# Altium PCB TarjetaMicrofono.PcbDoc
Units mil, origin at the board's own origin, x right, y up, seen from the top; angles counter-clockwise.
Board outline 1303.15 x 1129.92 mil, 2 copper layers (Top Layer, Bottom Layer); 10 components, 26 nets, 21 pads, 0 vias.
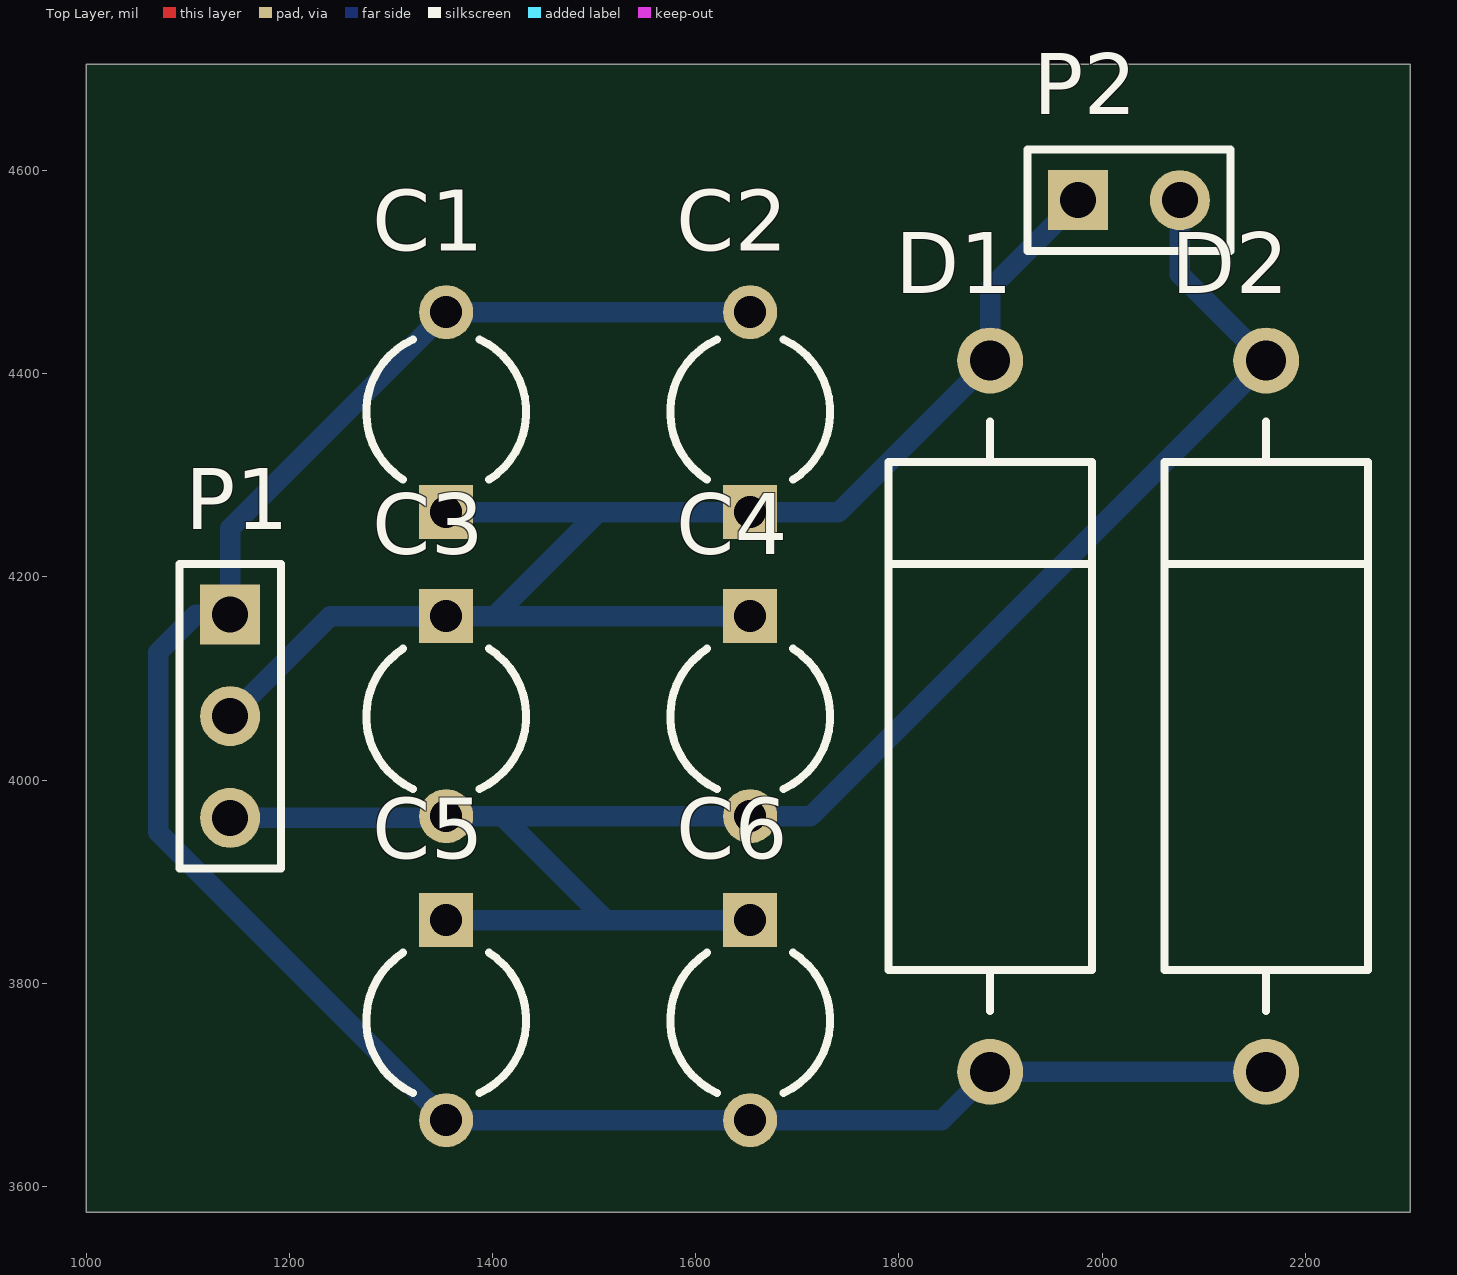
[diagram p0: Top Layer view]
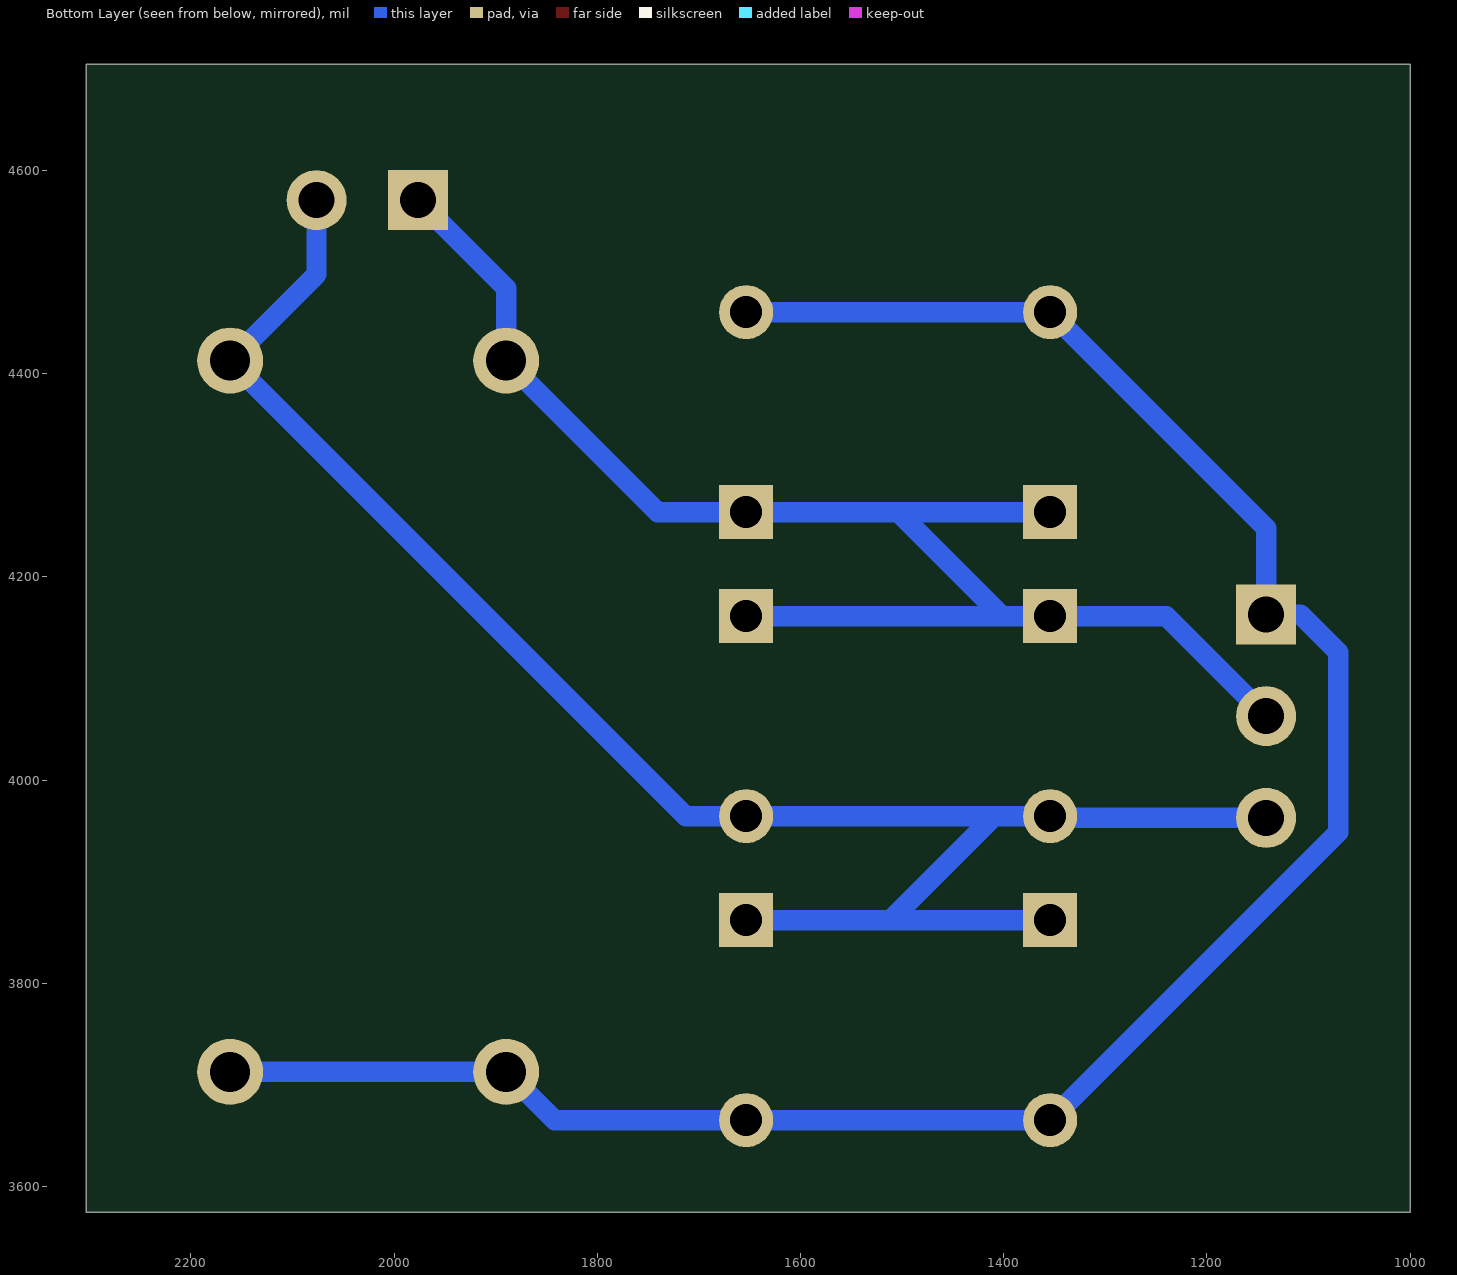
[diagram p1: Bottom Layer view, seen from below]

## Layer stack, top to bottom
Top Solder: solder mask 0.4, Solder Resist, Dk 3.5
Top Layer: signal copper 1.4
Dielectric 1: dielectric 12.6, FR-4, Dk 4.8
Bottom Layer: signal copper 1.4
Bottom Solder: solder mask 0.4, Solder Resist, Dk 3.5

## Board outline
1000,3574.8 2303.15,3574.8 2303.15,4704.72 1000,4704.72

## Design rules (kind name [scope] priority, off if disabled: settings)
Clearance [All] p1: gap=10 ignorepadtopadclearanceinfootprint=FALSE except(0: Arc-Hole Track-Hole SMDPad-Hole THPad-Hole Via-Hole Fill-Hole Poly-Hole Region-Hole Text-Hole)
PolygonConnect [All] p1: connectstyle=Relief reliefconductorwidth=10 reliefentries=4 polygonreliefangle="90 Angle" airgapwidth=10
RoutingVias [All] p1: holewidth=28 width=50 viastyle="Through Hole" minholewidth=28 minwidth=50 maxholewidth=28 maxwidth=50
SolderMaskExpansion [All] p1: expansion=4
Width Width_1 [All] p1: maxlimit=20 minlimit=10 preferedwidth=20
Width [All] p2: maxlimit=10 minlimit=10 preferedwidth=10
30 further rules are at their usual default settings.

## Components (designator, comment, footprint, x,y, rotation, side; value= is the part's Value field where it differs from the comment)
C1 "Cap2" CAPR5-4X5 1354.33,4362.2 r90 top value=33pF
C2 "Cap2" CAPR5-4X5 1653.54,4362.2 r90 top value=10pF
C3 "Cap2" CAPR5-4X5 1354.33,4062.99 r270 top value=33pF
C4 "Cap2" CAPR5-4X5 1653.54,4062.99 r270 top value=10pF
C5 "Cap2" CAPR5-4X5 1354.33,3763.78 r270 top value=33pF
C6 "Cap2" CAPR5-4X5 1653.54,3763.78 r270 top value=10pF
D1 "IN4737A" DIODE-0.7 1889.76,4062.99 r90 top
D2 "IN4737A" DIODE-0.7 2161.42,4062.99 r90 top
P1 "Header 3" HDR1X3 1141.73,4162.99 r270 top
P2 "Header 2" HDR1X2 1976.38,4570.87 r0 top

## Footprints (in the part's own frame and the unit in brackets; to place one, negate y for a bottom-side part, rotate by r counter-clockwise, add the part's x,y. Pads: shape width x height; smd on the part's side, far side on the other; paste and mask are expansions set on the pad)
CAPR5-4X5 [mm] "Capacitor; 2 Leads"
  rect 1.35x1.35 hole 0.8: 1(-2.5,0)
  round 1.35 hole 0.8: 2(2.5,0)
  silkscreen extent -1.69,-2 1.82,2
DIODE-0.7 [mm] "Diode, Thru-Hole; 2 Leads; 0.7 in Pin Spacing"
  round 1.65 hole 1: 1(-8.89,0) 2(8.89,0)
  silkscreen extent -7.37,-2.54 7.37,2.54
HDR1X2 [mm] "Connector; Header; 2 Position"
  rect 1.5x1.5 hole 0.9: 1(0,0)
  round 1.5 hole 0.9: 2(2.54,0)
  silkscreen extent -1.27,-1.27 3.81,1.27
HDR1X3 [mm] "Connector; Header; 3 Position"
  rect 1.5x1.5 hole 0.9: 1(0,0)
  round 1.5 hole 0.9: 2(2.54,0) 3(5.08,0)
  silkscreen extent -1.27,-1.27 6.35,1.27

## Part data
C1 C2 C3 C4 C5 C6: "Capacitor", PackageDescription="Capacitor; 2 Leads", PackageReference=CAPR5-4X5, Published=23-Sep-2002, Publisher="Altium Limited"
D1 D2: library part "D Zener", "Zener Diode", LatestRevisionDate=17-Jul-2002, LatestRevisionNote="Re-released for DXP Platform.", PackageDescription="Diode, Thru-Hole; 2 Leads; 0.7 in Pin Spacing", PackageReference=DIODE-0.7, Published=8-Jun-2000, Publisher="Altium Limited"
P1: "Header, 3-Pin", LatestRevisionDate=17-Jul-2002, LatestRevisionNote="Re-released for DXP Platform.", Publisher="Altium Limited"
P2: "Header, 2-Pin", LatestRevisionDate=17-Jul-2002, LatestRevisionNote="Re-released for DXP Platform.", Publisher="Altium Limited"

## Nets (pads, with @x,y where several pads share a name; then routed paths per layer and width w, separated by ;. In a path a pad name is that pad's centre, name@x,y a point inside that pad or via, vN(x,y) a via of type N, cw(c..) or ccw(c..) an arc to the next point about the centre after c; other vN are vias at no path point)
DTR: 
GND: C1.2 C2.2 C5.2 C6.2 D1.1 D2.1 P1.1 | length 2176
  Bottom Layer w20: C2.2 C1.2 1141.73,4248.03 P1.1 1107.87,4162.99 1070.87,4125.98 1070.87,3948.82 C5.2 C6.2 1842.13,3665.35 D1.1 D2.1
LOUDSPKN: 
LOUDSPKP: 
MIC2N: 
MIC2P: 
NetD3_2: 
NetD4_2: 
NETLIGHT: 
NetP6_5: 
NetP6_6: 
NetP6_7: 
NetQ1_2: 
NetQ2_2: 
NetQ2_3: 
NetQ3_2: 
NetQ3_3: 
P1: C1.1 C2.1 C3.1 C4.1 D1.2 P1.2 P2.1 | length 1488.3
  Bottom Layer w20: P1.2 1240.16,4161.42 C3.1 1401.57,4161.42 ; C1.1 1503.94,4263.78 ; C4.1 1401.57,4161.42 ; P2.1 1889.76,4484.25 D1.2 1740.55,4263.78 C2.1 1503.94,4263.78 ; 1401.57,4161.42 1503.94,4263.78
P2: C3.2 C4.2 C5.1 C6.1 D2.2 P1.3 P2.2 | length 1843.2
  Bottom Layer w20: P1.3 1352.76,3962.99 C3.2 1409.45,3964.57 ; C5.1 1511.81,3862.2 ; C6.1 1511.81,3862.2 ; P2.2 2076.38,4498.03 D2.2 1712.99,3964.57 C4.2 1409.45,3964.57 ; 1409.45,3964.57 1511.81,3862.2
PWR: 
PWRKEY: 
RXm: 
STA: 
STATUS: 
TXm: 
VBAT: 